# Altium PCB carte_puissance.PcbDoc
Units mil, origin at the board's own origin, x right, y up, seen from the top; angles counter-clockwise.
Board outline 1889.76 x 2440.94 mil, 4 copper layers (Top Layer, Internal Plane 1, Internal Plane 2, Bottom Layer); 11 components, 9 nets, 38 pads, 3 vias.
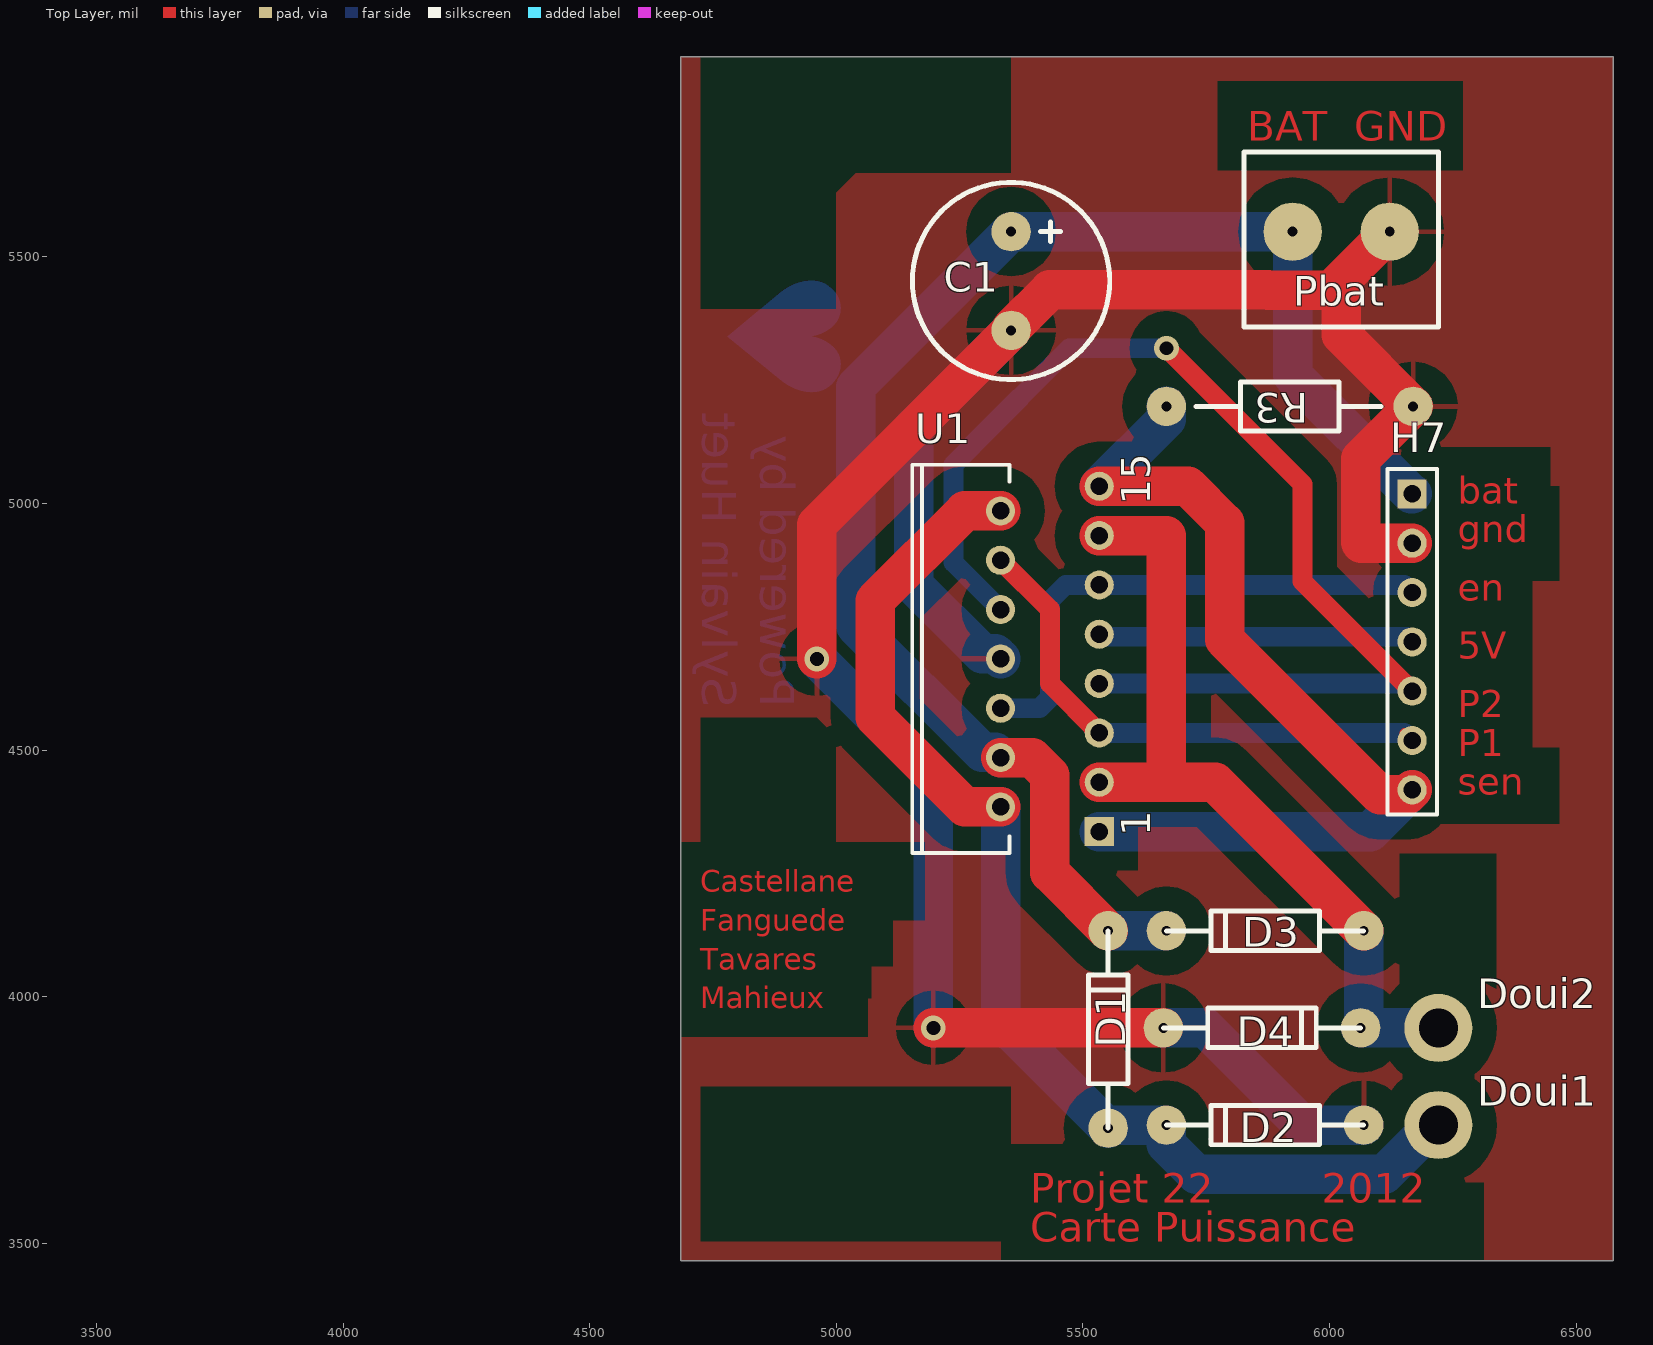
[diagram p0: Top Layer view]
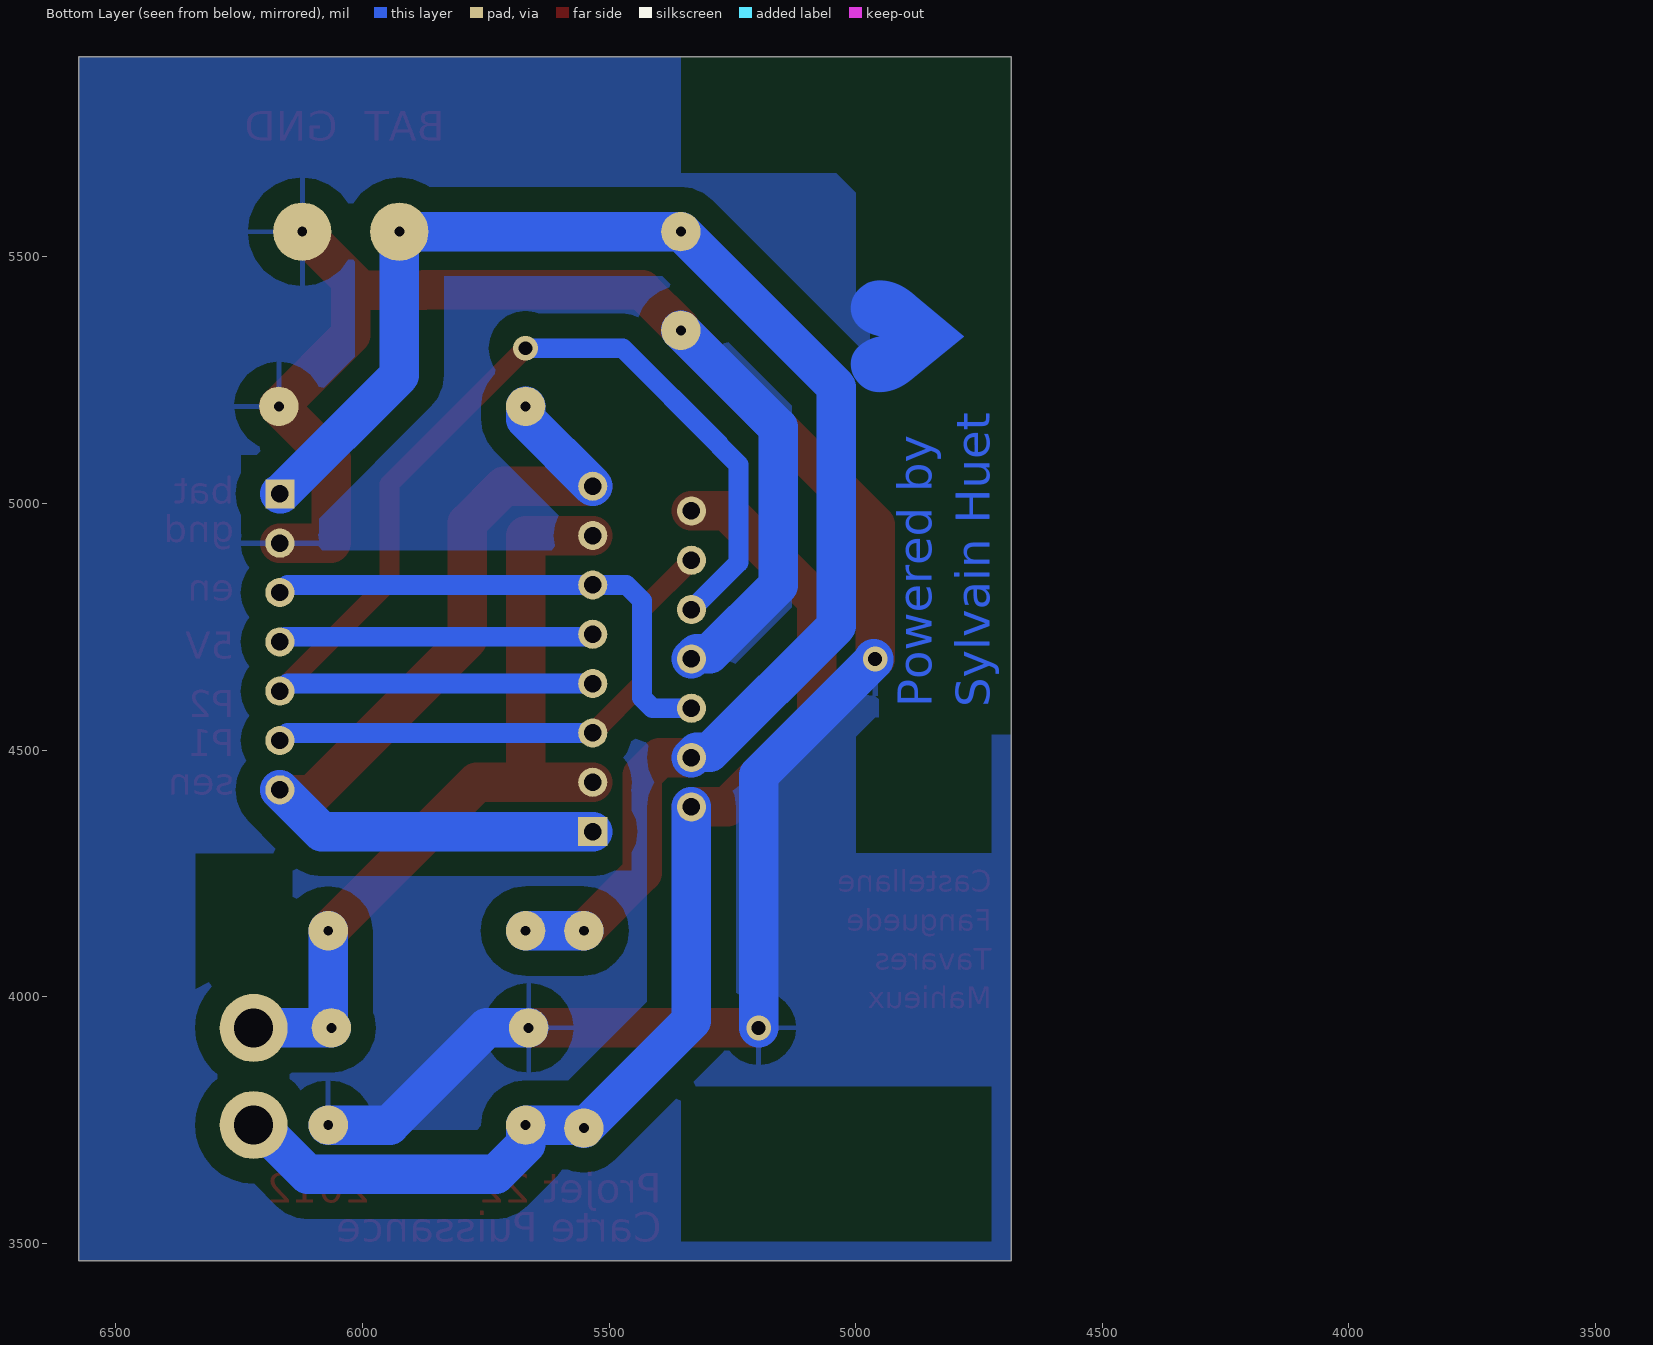
[diagram p1: Bottom Layer view, seen from below]
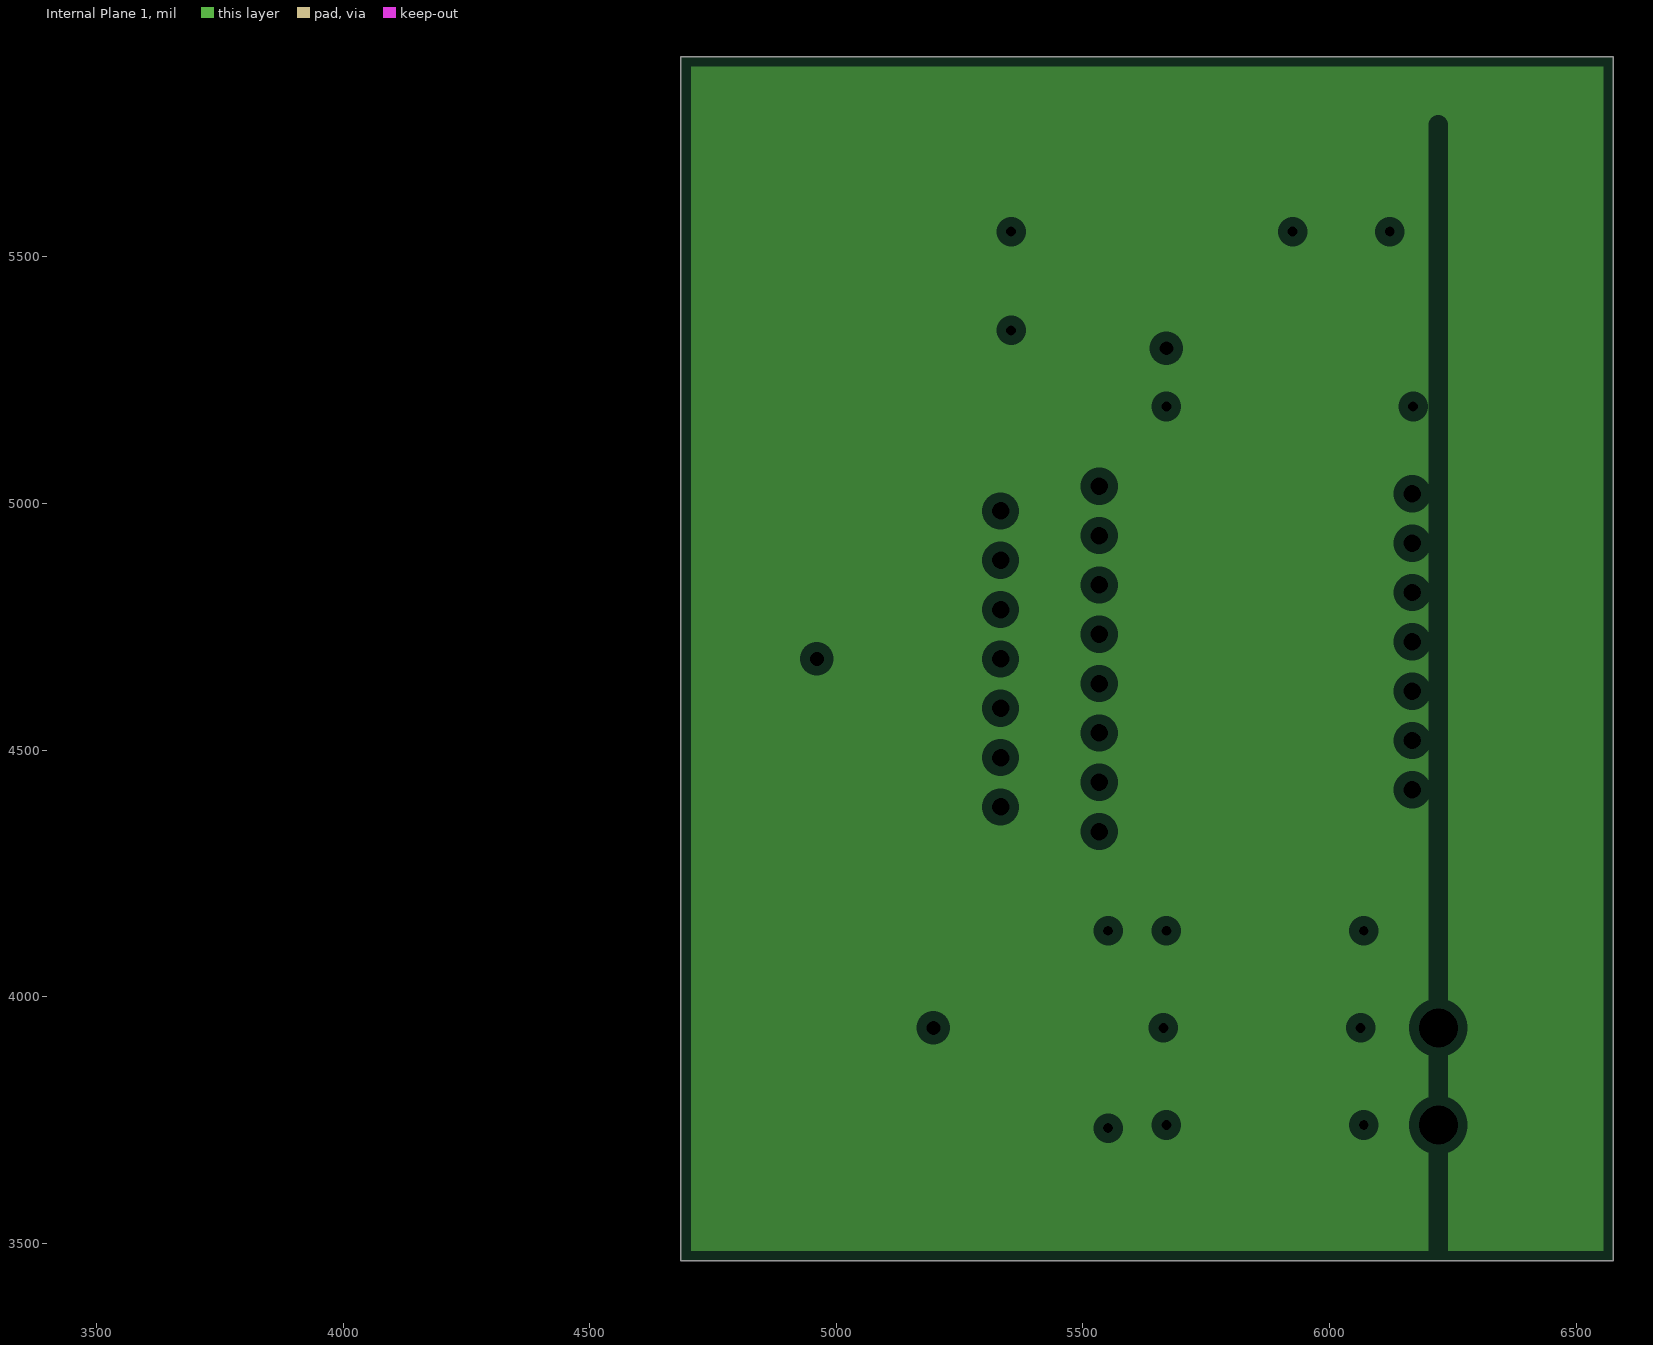
[diagram p2: Internal Plane 1, clearances drawn from the general rule]
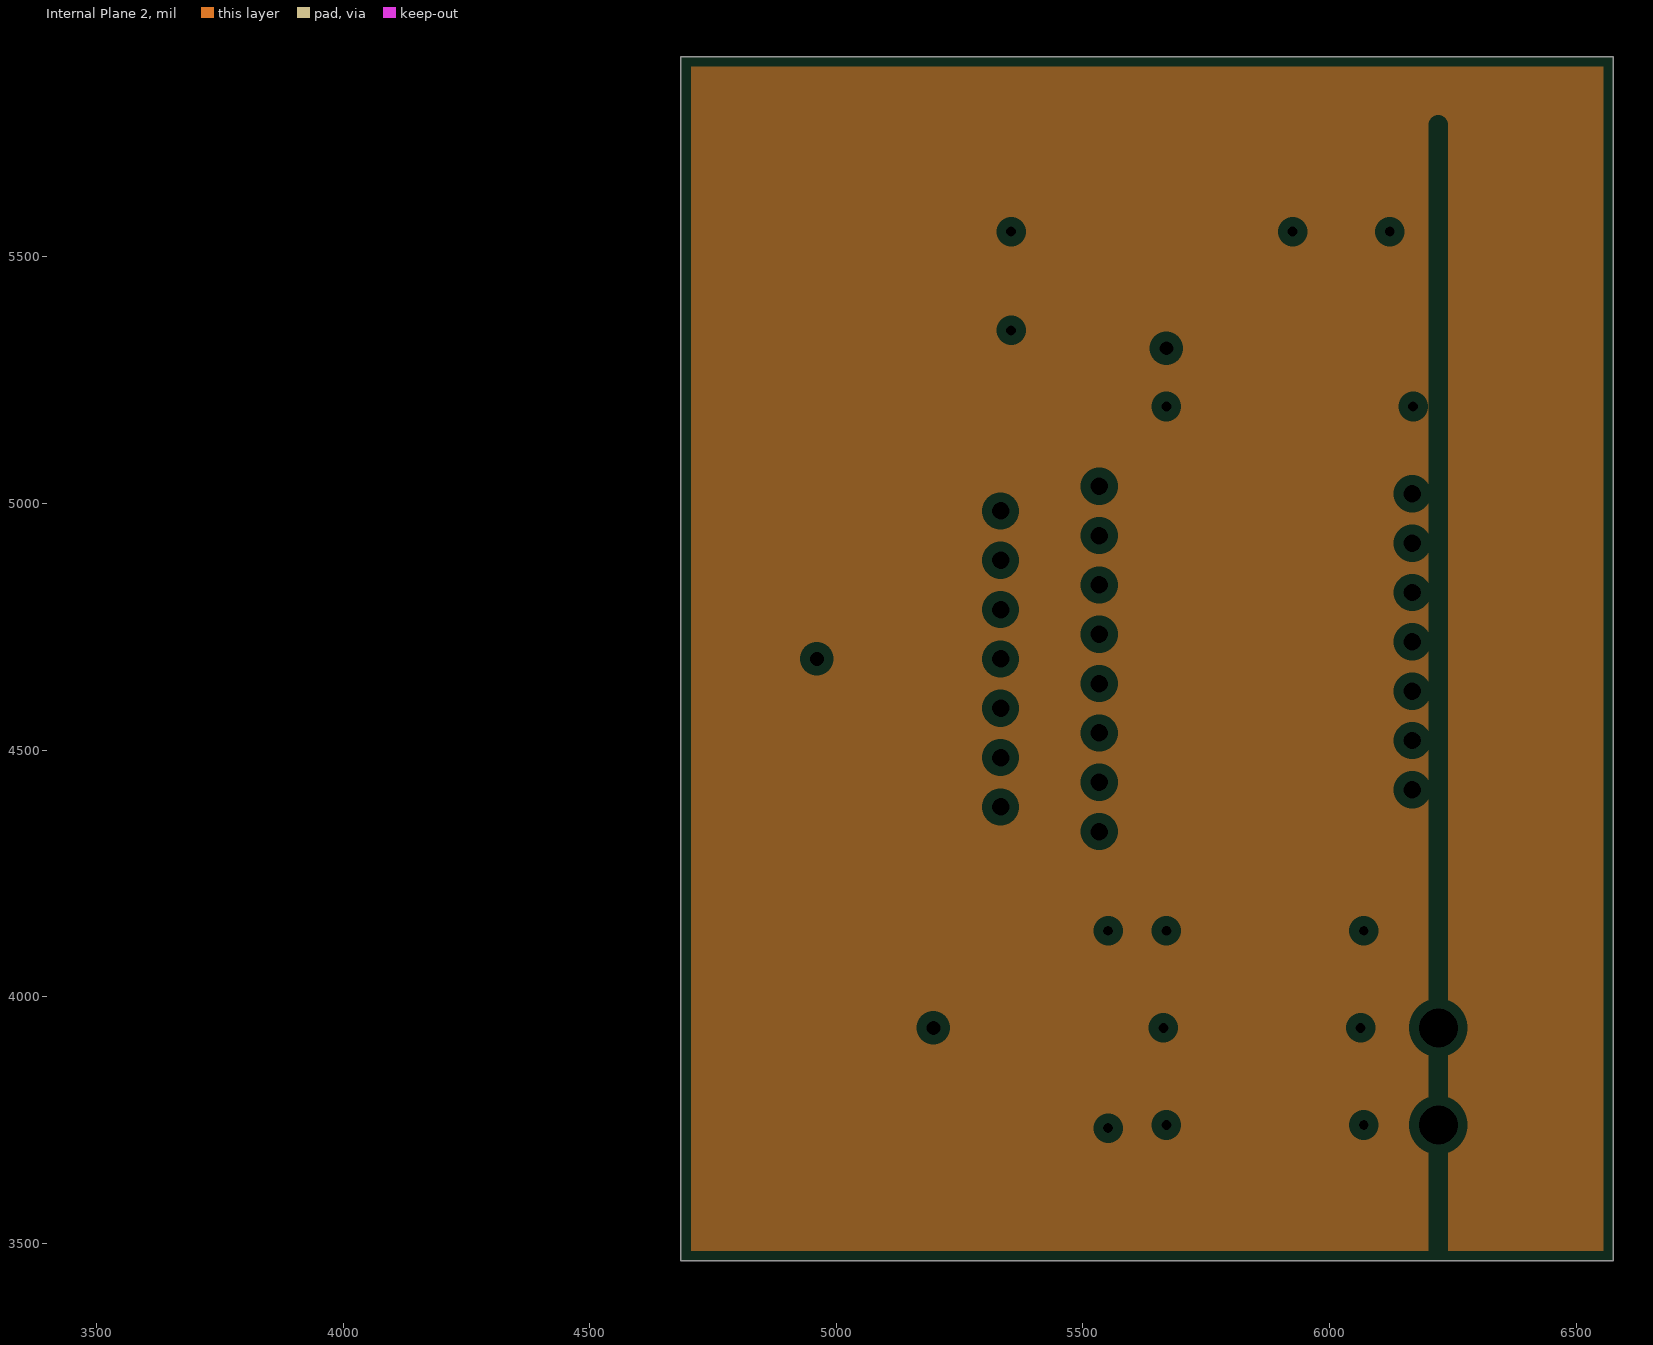
[diagram p3: Internal Plane 2, clearances drawn from the general rule]

## Layer stack, top to bottom
Top Layer: signal copper 1.4
Dielectric: dielectric 12.6, FR-4, Dk 4.8
Internal Plane 1: plane copper 1.4
Dielectric: dielectric 12.6, FR-4, Dk 4.8
Internal Plane 2: plane copper 1.4
Dielectric: dielectric 12.6, FR-4, Dk 4.8
Bottom Layer: signal copper 1.4

## Board outline
6574.8,5905.51 6574.8,3464.57 4685.04,3464.57 4685.04,5905.51

## Design rules (kind name [scope] priority, off if disabled: settings)
Clearance [All] p1: gap=20
FabricationTestPointUsage TestPointUsage [All] p1: valid=0 allowmultiple=FALSE
FabricationTestpoint Testpoint [All] p1: side=3 testpointundercomponent=TRUE minsize=40 maxsize=100 preferedsize=60 minholesize=0 maxholesize=40 preferedholesize=32 testpointgrid=1 allowsidetop=TRUE allowsidebottom=TRUE usegrid=TRUE gridtolerance=0.01
PlaneClearance [All] p1: clearance=20
PlaneConnect [All] p1: planeconnectstyle=Relief reliefexpansion=20 reliefentries=4 reliefconductorwidth=10 reliefairgap=10
PolygonConnect [All] p1: connectstyle=Relief reliefconductorwidth=10 reliefentries=4 polygonreliefangle="90 Angle"
RoutingVias [All] p1: holewidth=20 width=70 viastyle="Through Hole" minholewidth=28 minwidth=50 maxholewidth=28 maxwidth=50
SilkscreenOverComponentPads [All] p1: minsilkscreentomaskgap=10
SolderMaskExpansion [All] p1: expansion=4
Width [All] p1: maxlimit=200 minlimit=20 preferedwidth=40
23 further rules are at their usual default settings.

## Components (designator, comment, footprint, x,y, rotation, side; value= is the part's Value field where it differs from the comment)
C1 "Cap Pol2" Capa2_pol 5354.33,5551.18 r270 top
D1 "Diode 1N4148" Ddiode 5551.18,4133.86 r270 top
D2 "Diode 1N4148" Ddiode 5669.29,3740.16 r0 top
D3 "Diode 1N4148" Ddiode 5669.29,4133.86 r0 top
D4 "Diode 1N4148" Ddiode 6062.99,3937.01 r180 top
Doui1 "douille_2mm" Douille-2mm 6220.47,3740.16 r90 top
Doui2 "douille_2mm" Douille-2mm 6220.47,3937.01 r90 top
H7 "Header 7" HDR1X7 6167.44,5019.69 r270 top
Pbat "Batterie" Bornier_2 5826.77,5551.18 r0 top
R3 "Res2" res5_1/4W 5669.29,5196.85 r0 top
U1 "L298N" Multiwatt15V 5433.07,4685.04 r90 top

## Footprints (in the part's own frame and the unit in brackets; to place one, negate y for a bottom-side part, rotate by r counter-clockwise, add the part's x,y. Pads: shape width x height; smd on the part's side, far side on the other; paste and mask are expansions set on the pad)
Bornier_2 [mm]
  round 3 hole 0.508: 1(2.5,0) 2(7.5,0)
  silkscreen extent 0,-4.9 10,4.1
Capa2_pol [mil]
  round 80 hole 20: 1(0,0) 2(200,0)
  silkscreen extent -100,-200 300,200
Ddiode [mil]
  round 80 hole 20: A(400,0) K(0,0)
  silkscreen extent 0,-40 400,40
Douille-2mm [mm]
  round 3.5 hole 2: 1(0,0)
HDR1X7 [mm] "Connector; Header; 7 Position"
  rect 1.5x1.5 hole 0.9: 1(0,0)
  round 1.5 hole 0.9: 2(2.54,0) 3(5.08,0) 4(7.62,0) 5(10.16,0) 6(12.7,0) 7(15.24,0)
  silkscreen extent -1.27,-1.27 16.51,1.27
Multiwatt15V [mm] "TO, Thru-Hole, Vertical, Heatsink Mounted; 15 Bent Staggered Leads; Pitch 1.27 mm"
  rect 1.5x1.5 hole 0.9: 1(-8.89,-2.54)
  round 1.5 hole 0.9: 2(-7.62,2.54) 3(-6.35,-2.54) 4(-5.08,2.54) 5(-3.81,-2.54) 6(-2.54,2.54) 7(-1.27,-2.54) 8(0,2.54) 9(1.27,-2.54) 10(2.54,2.54) 11(3.81,-2.54) 12(5.08,2.54) 13(6.35,-2.54) 14(7.62,2.54) 15(8.89,-2.54)
  silkscreen extent -10,2.09 10,7.09
res5_1/4W [mil]
  round 80 hole 20: 1(0,0) 2(500,0)
  silkscreen extent 60,-50 435,50

## Part data
C1: "Polarized Capacitor (Radial)"
D1 D2 D3 D4: "High Conductance Fast Diode"
Doui1 Doui2: "1-Pin"
H7: "Header, 7-Pin"
Pbat: library part Bornier_2, "Header, 2-Pin"
R3: "Resistor"
U1: "Dual Full Bridge Driver"

## Via types
v1: diameter 50, hole 28, Top Layer to Bottom Layer, 3 vias

## Nets (pads, with @x,y where several pads share a name; then routed paths per layer and width w, separated by ;. In a path a pad name is that pad's centre, name@x,y a point inside that pad or via, vN(x,y) a via of type N, cw(c..) or ccw(c..) an arc to the next point about the centre after c; other vN are vias at no path point)
EN: H7.3 U1.6 U1.11 | length 1059.6
  Bottom Layer w20: H7.3@6152.09,4835.04 H7.3
  Bottom Layer w40: U1.6 5411.81,4585.04 5433.07,4606.3 5433.07,4803.15 5464.96,4835.04 U1.11 H7.3@6152.09,4835.04
GND: C1.2 D2.A D4.A H7.2 Pbat.2 R3.2 U1.8 | length 5058
  Top Layer w80: v1(4960.63,4685.04) 4960.63,4957.48 C1.2 5354.33,5354.33 5433.07,5433.07 5874.94,5433.07 5875.88,5432.13 6002.99,5432.13 ; v1(5196.85,3937.01) D4.A ; Pbat.2 6002.99,5432.13 ; H7.2 6064.57,4919.69 6062.99,4921.26 6062.99,5090.55 R3.2 6023.62,5342.52 6023.62,5432.13 6002.99,5432.13
  Bottom Layer w80: v1@4963.59,4685.04 4963.59,4682.08 5196.85,4448.82 v1(5196.85,3937.01) ; U1.8 5322.6,4695.51 5295.99,4695.51 5157.48,4834.02 5157.48,5154.33 C1.2 ; D4.A 5748.03,3937.01 5944.88,3740.16 D2.A
MOTOR1: D1.A D2.K Doui1.1 U1.2 U1.14 | length 2414.9
  Top Layer w80: U1.2 5260.63,4385.04 5078.74,4566.93 5078.74,4803.15 5260.63,4985.04 U1.14 ; Doui1.1@6210.71,3740.16 Doui1.1
  Bottom Layer w80: U1.2 5333.07,3951.97 D1.A 5557.48,3740.16 D2.K 5669.29,3700.79 5729.92,3640.16 6110.71,3640.16 Doui1.1@6210.71,3740.16
MOTOR2: D3.A D4.K Doui2.1 U1.3 U1.13 | length 1654.1
  Top Layer w80: U1.3 5669.29,4435.04 ; U1.13 5669.29,4935.04 5669.29,4435.04 ; D3.A 5768.11,4435.04 5669.29,4435.04
  Bottom Layer w80: D3.A 6069.29,3943.31 D4.K Doui2.1
PWM1: H7.6 U1.5 U1.12 | length 1073.6
  Top Layer w20: H7.6@6152.09,4535.04 H7.6
  Top Layer w40: U1.12 5433.07,4785.04 5433.07,4635.04 U1.5
  Bottom Layer w40: U1.5 H7.6@6152.09,4535.04
PWM2: H7.5 U1.7 U1.10 | length 2406
  Top Layer w40: v1(5669.29,5314.96) 5944.88,5039.37 5944.88,4842.24 H7.5
  Bottom Layer w40: U1.10 5237.48,4880.63 5237.48,5078.74 5275.59,5116.85 5275.59,5118.11 5472.44,5314.96 v1(5669.29,5314.96) ; U1.7 6152.09,4635.04 H7.5
SENSE: H7.7 R3.1 U1.1 U1.15 | length 1923.8
  Top Layer w80: U1.15 5712.99,5035.04 5787.4,4960.63 5787.4,4724.41 6102.36,4409.45 6157.2,4409.45 H7.7
  Bottom Layer w80: U1.1 6082.8,4335.04 H7.7 ; U1.15 5669.29,5171.26 R3.1
V_5V_FPT: H7.4 U1.9 | length 640.7
  Top Layer w40: U1.9 U1.9@5537.95,4730.16
  Bottom Layer w40: U1.9@5537.95,4730.16 6156.97,4730.16 H7.4
V_BAT: C1.1 D1.K D3.K H7.1 Pbat.1 U1.4 | length 3134.6
  Top Layer w80: U1.4 5396.85,4485.04 5433.07,4448.82 5433.07,4251.97 D1.K
  Bottom Layer w80: U1.4 5322.6,4495.51 5295.99,4495.51 5039.37,4752.13 5039.37,5236.22 C1.1 Pbat.1 5925.2,5260.15 6165.67,5019.69 H7.1 ; D1.K D3.K

## Polygon pours and split planes (outlines as drawn)
GND on Top Layer "Bottom Layer-No Net" (solid, remove dead copper, pour order 5): 4685.04,5905.51 6574.8,5905.51 6574.8,3464.57 4685.04,3464.57
GND on Bottom Layer "Bottom Layer-GND" (solid, remove dead copper, pour order 7): 4685.04,5905.51 6574.8,5905.51 6574.8,3464.57 4685.04,3464.57
no net on Internal Plane 1 (split plane): 6554.71,3484.66 6240.57,3484.66 6240.57,5767.72 6240.18,5771.64 6239.04,5775.41 6237.18,5778.88 6234.68,5781.93 6231.64,5784.43 6228.16,5786.28 6224.39,5787.43 6220.47,5787.81 6216.55,5787.43 6212.78,5786.28 6209.31,5784.43 6206.26,5781.93 6203.76,5778.88 6201.91,5775.41 6200.76,5771.64 6200.38,5767.72 6200.38,3484.66 4705.14,3484.66 4705.14,5885.41 6554.71,5885.41
no net on Internal Plane 2 (split plane): 6554.71,3484.66 6240.57,3484.66 6240.57,5767.72 6240.18,5771.64 6239.04,5775.41 6237.18,5778.88 6234.68,5781.93 6231.64,5784.43 6228.16,5786.28 6224.39,5787.43 6220.47,5787.81 6216.55,5787.43 6212.78,5786.28 6209.31,5784.43 6206.26,5781.93 6203.76,5778.88 6201.91,5775.41 6200.76,5771.64 6200.38,5767.72 6200.38,3484.66 4705.14,3484.66 4705.14,5885.41 6554.71,5885.41

## Other copper
Top Layer:
  text "BAT" at 5833.35,5735.79 h60
  text "GND" at 6049.88,5735.79 h60
  text "bat" at 6259.84,5000 h55.12
  text "gnd" at 6259.84,4921.26 h55.12
  text "en" at 6259.84,4803.15 h55.12
  text "5V" at 6259.84,4685.04 h55.12
  text "P2" at 6259.84,4566.93 h55.12
  text "P1" at 6259.84,4488.19 h55.12
  text "sen" at 6259.84,4409.45 h55.12
  text "Castellane" at 4724.41,4212.6 h43.31
  text "Fanguede" at 4724.41,4133.86 h43.31
  text "Tavares" at 4724.41,4055.12 h43.31
  text "Mahieux" at 4724.41,3976.38 h43.31
  text "Projet 22" at 5393.7,3582.68 h60
  text "2012" at 5984.25,3582.68 h60
  text "Carte Puissance" at 5393.7,3503.94 h60
Bottom Layer:
  text "♥" at 4704.72,5196.85 h393.7 r270
  text "Sylvain Huet" at 4704.72,4586.61 h118.11 r270
  text "Powered by" at 4822.83,4586.61 h118.11 r270
Multi-Layer:
  pour cut-out: 5354.33,5669.29 5354.33,5905.51 4724.41,5905.51 4724.41,5393.7 5000,5393.7 5000,5629.92 5039.37,5669.29
  pour cut-out: 5354.33,3818.9 4724.41,3818.9 4724.41,3503.94 5354.33,3503.94
  pour cut-out: 4724.41,4566.93 4960.63,4566.93 5000,4527.56 5000,4291.34 4724.41,4291.34
  pour cut-out: 6141.73,4291.34 6338.58,4291.34 6338.58,4015.75 6259.84,4055.12 6141.73,4015.75

## Text inside footprints (layer, text, board x,y; h text height)
U1: Top Overlay "15" at 5636.42,4997.64 h59.06 r90; Top Overlay "1" at 5636.42,4325.98 h59.06 r90